# Altium PCB motor_crash_detection_device_pcb.PcbDoc
Units mil, origin at the board's own origin, x right, y up, seen from the top; angles counter-clockwise.
Board outline 6000 x 4000 mil, 2 copper layers (Top Layer, Bottom Layer); 39 components, 25 nets, 140 pads, 0 vias.
Unrouted connection lines stored in the file: 76.
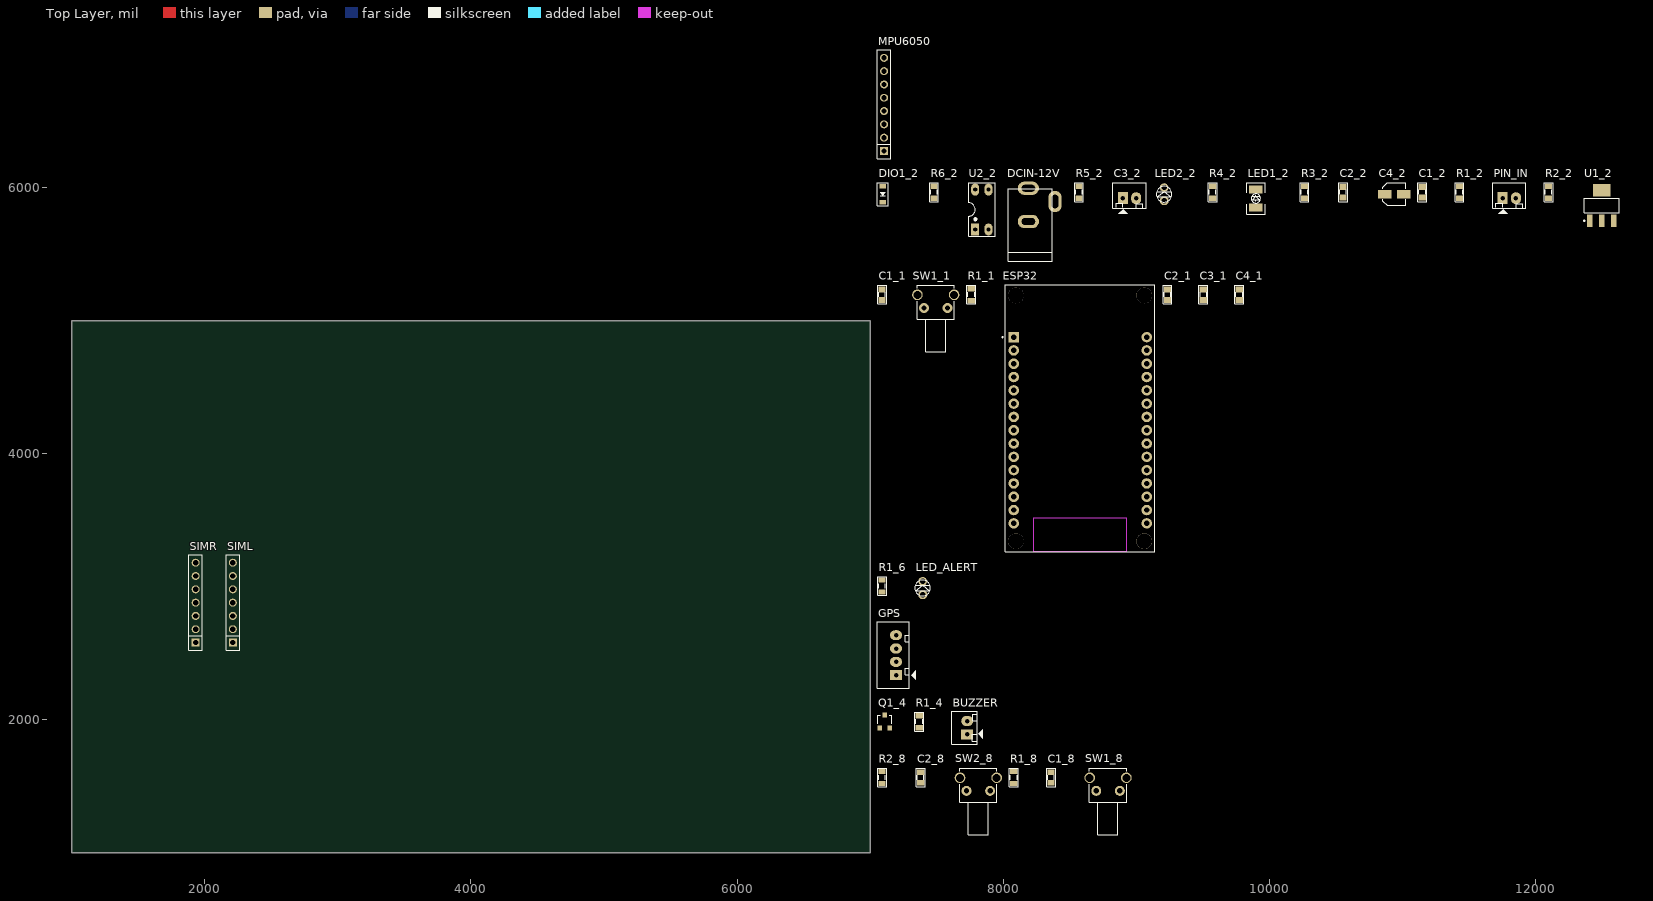
[diagram p0: Top Layer view]
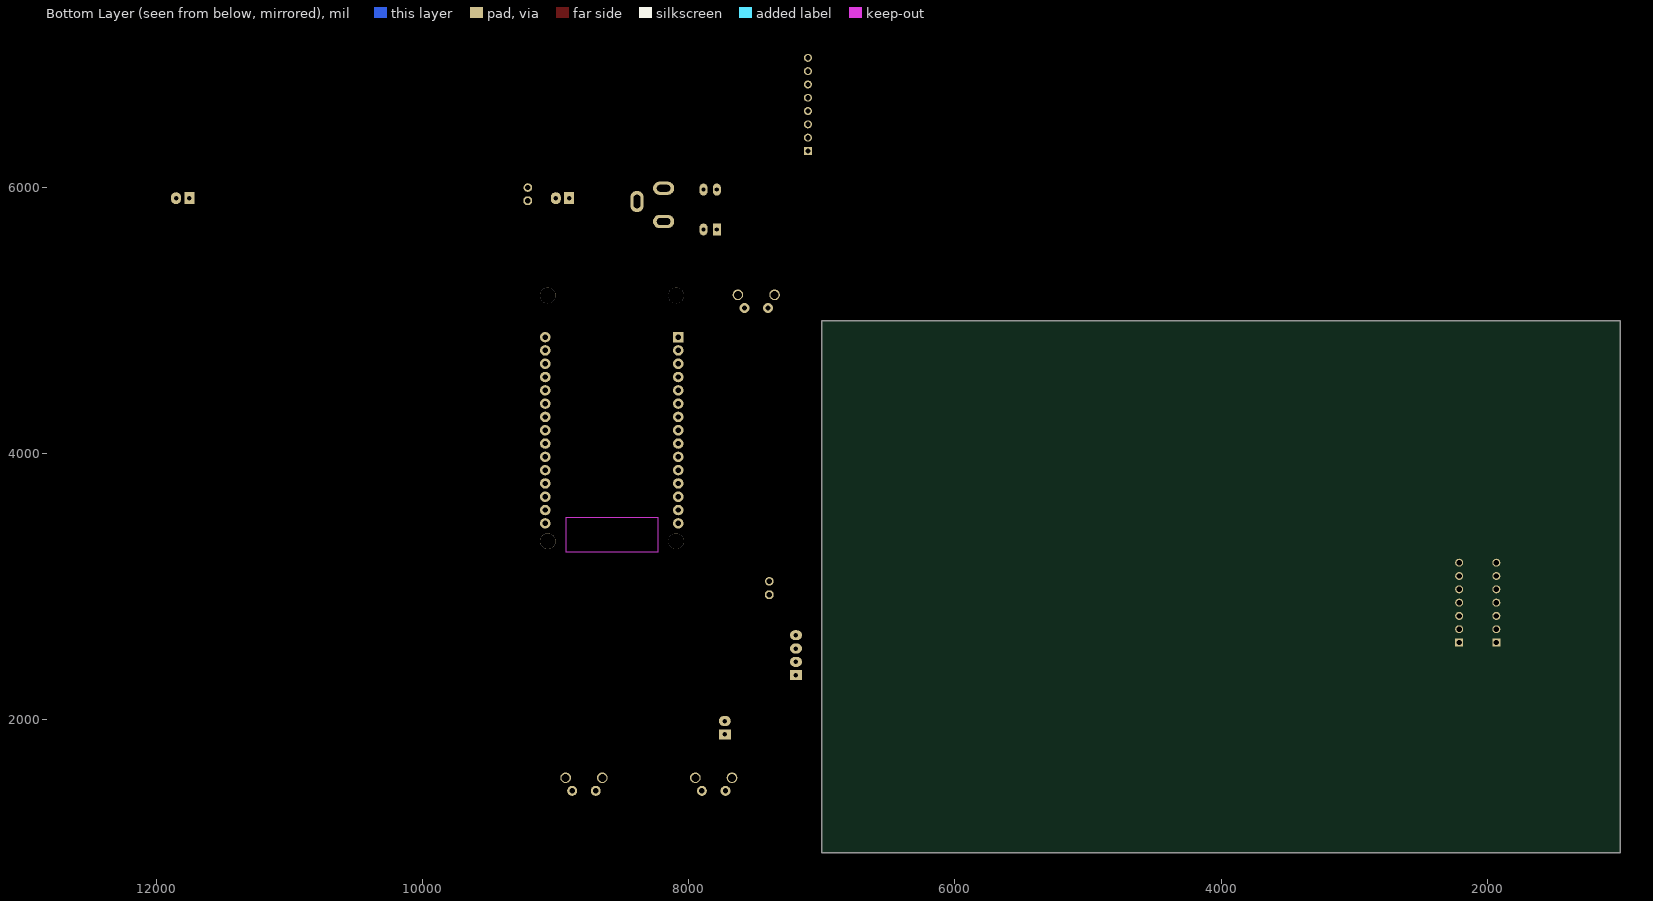
[diagram p1: Bottom Layer view, seen from below]

## Layer stack, top to bottom
Top Solder: solder mask 0.4, Solder Resist, Dk 3.5
Top Layer: signal copper 1.4
Dielectric 1: dielectric 12.6, FR-4, Dk 4.8
Bottom Layer: signal copper 1.4
Bottom Solder: solder mask 0.4, Solder Resist, Dk 3.5

## Board outline
1000,1000 7000,1000 7000,5000 1000,5000

## Design rules (kind name [scope] priority, off if disabled: settings)
Clearance [All] p1: gap=10 ignorepadtopadclearanceinfootprint=FALSE except(0: Arc-Hole Track-Hole SMDPad-Hole THPad-Hole Via-Hole Fill-Hole Poly-Hole Region-Hole Text-Hole)
PolygonConnect [All] p1: connectstyle=Relief reliefconductorwidth=10 reliefentries=4 polygonreliefangle="90 Angle" airgapwidth=10
RoomDefinition Designator_7 [InComponentClass('Designator')] p1: confinementstyle=ConfineIn formatcopy=TRUE lockcomponents=FALSE outline 1870,2510 2395,2510 2395,3350 1870,3350
RoomDefinition Designator_6 [InComponentClass('Designator')] p2: confinementstyle=ConfineIn formatcopy=TRUE lockcomponents=FALSE outline 7045,7195 7570,7195 7570,8035 7045,8035
RoomDefinition Designator_5 [InComponentClass('Designator')] p3: confinementstyle=ConfineIn formatcopy=TRUE lockcomponents=FALSE outline 7045,7195 7570,7195 7570,8035 7045,8035
RoomDefinition Designator_4 [InComponentClass('Designator')] p4: confinementstyle=ConfineIn formatcopy=TRUE lockcomponents=FALSE outline 7045,7195 7570,7195 7570,8035 7045,8035
RoomDefinition Designator_3 [InComponentClass('Designator')] p5: confinementstyle=ConfineIn formatcopy=TRUE lockcomponents=FALSE outline 7045,7195 7570,7195 7570,8035 7045,8035
RoomDefinition Designator_2 [InComponentClass('Designator')] p6: confinementstyle=ConfineIn formatcopy=TRUE lockcomponents=FALSE outline 7045,7195 7570,7195 7570,8035 7045,8035
RoomDefinition Designator_1 [InComponentClass('Designator')] p7: confinementstyle=ConfineIn formatcopy=TRUE lockcomponents=FALSE outline 7045,7195 7570,7195 7570,8035 7045,8035
RoomDefinition Designator [InComponentClass('Designator')] p8: confinementstyle=ConfineIn formatcopy=TRUE lockcomponents=FALSE outline 7045,7195 7570,7195 7570,8035 7045,8035
RoutingVias [All] p1: holewidth=28 width=50 viastyle="Through Hole" minholewidth=28 minwidth=50 maxholewidth=28 maxwidth=50
SolderMaskExpansion [All] p1: expansion=4 istentingtop=FALSE
Width [All] p1: maxlimit=10 minlimit=10 preferedwidth=10
30 further rules are at their usual default settings.

## Classes and differential pairs
component class Designator: SIML SIMR

## Components (designator, comment, footprint, x,y, rotation, side; value= is the part's Value field where it differs from the comment)
BUZZER "Buzzer" Header2 7730,1890 r90 top
C1_1 "100nF" CN-SMD-0805 7090,5195 r90 top value=33pF
C1_2 "100nF" CN-SMD-0805 11150,5965 r90 top value=33pF
C1_8 "100nF" CN-SMD-0805 8360,1565 r90 top value=33pF
C2_1 "100nF" CN-SMD-0805 9235,5195 r90 top value=33pF
C2_2 "100nF" CN-SMD-0805 10555,5965 r90 top value=33pF
C2_8 "100nF" CN-SMD-0805 7380,1565 r90 top value=33pF
C3_1 "100nF" CN-SMD-0805 9505,5195 r90 top value=33pF
C3_2 "12DC-PIN" Header2 8900,5920 r0 top
C4_1 "100nF" CN-SMD-0805 9775,5195 r90 top value=33pF
C4_2 "10uF-16V" CAP-ALU-SMD-4.5x5x1.4 10940,5950 r0 top
DCIN-12V "DCIN-12V" DC0 8290,5870 r90 top value="Jac DC"
DIO1_2 "Diode SMD" DIO-SMD-123 7095,5950 r90 top value=1N5007
ESP32 "ESP32" MODULE_ESP32_DEVKIT_V1 8580,4265 r0 top
GPS "GPS" Header4 7195,2335 r90 top
LED1_2 "LED" LED-GREEN-0805 9900,5850 r90 top value="LED 3 - 5 ly 2 Colour"
LED2_2 "LED" LED-3MM-RED 9210,5900 r90 top value="LED 3 ly Single Colour"
LED_ALERT "LED" LED-3MM-GREEN 7395,2940 r90 top value="LED 3 ly Single Colour"
MPU6050 "MPU6050" JP8-C1T 7105,6275 r90 top
PIN_IN "PIN_IN" Header2 11755,5920 r0 top
Q1_4 "C1815" SOT23-321 7110,1985 r0 top
R1_1 "10k" RES-SMD-0805 7760,5195 r90 top
R1_2 "10k" RES-SMD-0805 11430,5965 r90 top
R1_4 "1k" RES-SMD-0805 7370,1985 r90 top
R1_6 "1k" RES-SMD-0805 7090,3005 r90 top
R1_8 "10k" RES-SMD-0805 8080,1565 r90 top
R2_2 "220" RES-SMD-0805 12100,5965 r90 top
R2_8 "10k" RES-SMD-0805 7090,1565 r90 top
R3_2 "1k" RES-SMD-0805 10265,5965 r90 top
R4_2 "2k" RES-SMD-0805 9575,5965 r90 top
R5_2 "10k" RES-SMD-0805 8570,5965 r90 top
R6_2 "10k" RES-SMD-0805 7480,5965 r90 top
SIML "SIM" JP7-C1T 2210,2580 r90 top
SIMR "SIM" JP7-C1T 1930,2580 r90 top
SW1_1 "SW" SW1-DIP 7405,5095 r0 top value="SW chip 2 pin"
SW1_8 "SW" SW1-DIP 8700,1465 r0 top value="SW chip 2 pin"
SW2_8 "SW" SW1-DIP 7725,1465 r0 top value="SW chip 2 pin"
U1_2 "LM1117-3.3V" SOT223 12500,5865 r0 top
U2_2 "PC817" DIP4 7790,5685 r0 top

## Footprints (in the part's own frame and the unit in brackets; to place one, negate y for a bottom-side part, rotate by r counter-clockwise, add the part's x,y. Pads: shape width x height; smd on the part's side, far side on the other; paste and mask are expansions set on the pad)
CAP-ALU-SMD-4.5x5x1.4 [mm]
  rect 2.6x1.6 smd: 1(-1.8,0) 2(1.8,0)
  silkscreen extent -2.15,-2.15 2.15,2.15, body extent -2.5,-2.15 2.5,2.15, height 5.45
CN-SMD-0805 [mil]
  rect 43.31x55 smd: 1(-39.36,0.01) 2(39.37,0.01)
  silkscreen extent -70,-34 70,33, body extent -39,-25 39,25, height 31
DC0 [mil] "Jac DC input"
  oval 100x160 hole 50 slot 100 at 90 deg: 1(125,100) 2(-125,100)
  oval 160x100 hole 50 slot 100 at 0 deg: 3(25,-100)
  silkscreen extent -425,-80 120,250, body extent -410,-105 134,269, height 434
DIO-SMD-123 [mm]
  rect 0.9x1.2 smd: 1(1.524,0) 2(-1.524,0)
  silkscreen extent -2.16,-1.02 2.16,1.02, body extent -1.76,-0.8 1.94,0.8, height 1.25
DIP4 [mil]
  rect 60x90 hole 31: 1(0,0)
  oval 60x90 hole 31: 2(100,0) 3(100,300) 4(0,300)
  silkscreen extent -50,-50 150,350, body extent -59,-10 159,305, height 170
Header2 [mil] "CON2"
  rect 75x90 hole 34: 1(0,0)
  oval 75x90 hole 34: 2(100,0)
  silkscreen extent -75,-118 175,115, body extent -68,-70 168,107, height 236
Header4 [mil] "CON4"
  rect 75x90 hole 34: 1(0,0)
  oval 75x90 hole 34: 2(100,0) 3(200,0) 4(300,0)
  silkscreen extent -100,-150 400,140, body extent -90,-90 398,136, height 276
JP7-C1T [mm] "7 row, straight, gold plating"
  rect 1.52x1.52 hole 1.02: 1(0,0)
  round 1.52 hole 1.02: 2(2.54,0) 3(5.08,0) 4(7.62,0) 5(10.16,0) 6(12.7,0) 7(15.24,0)
  silkscreen extent -1.52,-1.27 16.76,1.27, body extent -1.52,-1.25 16.76,1.25, height 8.51
JP8-C1T [mm] "8 row, straight, gold plating"
  rect 1.52x1.52 hole 1.02: 1(0,0)
  round 1.52 hole 1.02: 2(2.54,0) 3(5.08,0) 4(7.62,0) 5(10.16,0) 6(12.7,0) 7(15.24,0) 8(17.78,0)
  silkscreen extent -1.52,-1.27 19.3,1.27, body extent -1.52,-1.25 19.3,1.25, height 8.51
LED-3MM-GREEN [mil]
  oct 65x65 hole 40: 1(0,0)
  round 65 hole 40: 2(100,0)
  silkscreen extent -9,-59 109,59, body extent -15,-70 112,60, height 182
LED-3MM-RED [mil]
  oct 65x65 hole 40: 1(0,0)
  round 65 hole 40: 2(100,0)
  silkscreen extent -9,-59 109,59, body extent -27,-77 117,80, height 181
LED-GREEN-0805 [mil]
  rect 60x100 smd: 1(0,0) 2(135,0)
  silkscreen extent -50,-70 185,70, body extent -20,-60 154,60, height 75
MODULE_ESP32_DEVKIT_V1 [mm]
  rect 2x2 hole 1.02: 1(-12.7,15.515)
  round 2 hole 1.02: 2(-12.7,12.975) 3(-12.7,10.435) 4(-12.7,7.895) 5(-12.7,5.355) 6(-12.7,2.815) 7(-12.7,0.275) 8(-12.7,-2.265) 9(-12.7,-4.805) 10(-12.7,-7.345) 11(-12.7,-9.885) 12(-12.7,-12.425) 13(-12.7,-14.965) 14(-12.7,-17.505) 15(-12.7,-20.045) 16(12.7,-20.045) 17(12.7,-17.505) 18(12.7,-14.965) 19(12.7,-12.425) 20(12.7,-9.885) 21(12.7,-7.345) 22(12.7,-4.805) 23(12.7,-2.265) 24(12.7,0.275) 25(12.7,2.815) 26(12.7,5.355) 27(12.7,7.895) 28(12.7,10.435) 29(12.7,12.975) 30(12.7,15.515)
  round 3 hole 3 unplated: ""(-12.28,-23.475) ""(-12.28,23.475) ""(12.23,-23.475) ""(12.23,23.475)
  Keep-Out Layer region: 8.78,-25.475 -8.91,-25.475 -8.91,-18.985 8.78,-18.985
  Keep-Out Layer region: 8.78,-25.475 -8.91,-25.475 -8.91,-18.985 8.78,-18.985
  silkscreen extent -14.95,-25.48 14.23,25.48
RES-SMD-0805 [mil]
  rect 39.37x55 smd: 1(-45,0) 2(45,0)
  silkscreen extent -70,-34 70,33, body extent -39,-25 39,25, height 31
SOT23-321 [mm]
  rect 0.9x0.95 smd mask+0: 1(0.95,-1.25)
  rect 0.9x0.95 smd: 2(0,1.25) 3(-0.95,-1.25)
  silkscreen extent -1.3,-0.38 1.3,1.25, body extent -1.52,-1.23 1.48,1.27, height 1.06
SOT223 [mm]
  rect 1x2.4 smd: 1(-2.3,-2.9) 2(0,-2.9) 3(2.3,-2.9)
  rect 3.3x2.4 smd: 4(0,2.9)
  silkscreen extent -3.47,-3.02 3.35,1.4, body extent -3.25,-3.56 3.25,3.4, height 1.68
SW1-DIP [mil]
  round 75 hole 40: 1(0,0) 2(177.16,0)
  round 80 hole 60: ""(-49.21,98.43) ""(226.38,98.43)
  silkscreen extent -51,-331 228,171, body extent -87,-398 265,160, height 283

## Part data
BUZZER C3_2 PIN_IN: library part Header2, "Header IDC, 2 x 1 Pin Vertical 2.54mm Pitch (Non-Boxed, Male)", Manufacturer="W¨¹rth Elektronik eiSos GmbH", partNo=613002143121, ComponentLink1 Description=Manufacturer, ComponentLink1URL=http://www.we-online.com, ComponentLink2 Description=Datasheet, ComponentLink2URL=http://katalog.we-online.de/em/datasheet/6130xx143121.pdf, Created by="Karrer Zheng", Created Date="29 March 2013", NoPins=02
C1_1 C1_2 C1_8 C2_1 C2_2 C2_8 C3_1 C4_1: library part CN
C4_2: library part CN-ALU-SMD, "Polarized Capacitor (Axial)", LatestRevisionDate=17-Jul-2002, LatestRevisionNote="Re-released for DXP Platform.", PackageReference=POLAR0.8, Published=8-Jun-2000, Publisher="Altium Limited"
DCIN-12V: library part DCIN, "Jac DC input"
DIO1_2: "Default Diode", Code - JEDEC=DO-214-AB, Published=8-Jun-2000, Publisher="Altium Limited", Revision="July-2002: Re-released for DXP Platform."
ESP32: library part ESP32-DEVKIT-V1, "Dual core, Wi-Fi: 2.4 GHz up to 150 Mbits/s,BLE (Bluetooth Low Energy) and legacy Bluetooth, 32 bits, Up to 240 MHz", Package=None, Availability=Unavailable, MP=ESP32-DEVKIT-V1, Price=None
GPS: library part Header4, "Header IDC, 4 x 1 Pin Vertical 2.54mm Pitch (Non-Boxed, Male)", Manufacturer="W¨¹rth Elektronik eiSos GmbH", partNo=613002143121, ComponentLink1 Description=Manufacturer, ComponentLink1URL=http://www.we-online.com, ComponentLink2 Description=Datasheet, ComponentLink2URL=http://katalog.we-online.de/em/datasheet/6130xx143121.pdf, Created by="Karrer Zheng", Created Date="29 March 2013", NoPins=02
LED1_2: library part "LED SMD"
LED2_2 LED_ALERT: "LED Single colour Green and Red"
MPU6050: library part JP8, "WR-PHD 2.54 mm Angled Socket Header", Manufacturer="W¨¹rth Elektronik eiSos GmbH", partNo=613008143121, ComponentLink1 Description=Manufacturer, ComponentLink1URL=http://www.we-online.com, ComponentLink2 Description=Datasheet, ComponentLink2URL=http://katalog.we-online.de/em/datasheet/6130xx143121.pdf, Created by="Karrer Zheng", Created Date="29 March 2013", NoPins=08
Q1_4: library part 2SC1815, "NPN 600mW, ECB"
R1_1 R1_2 R1_4 R1_6 R1_8 R2_2 R2_8 R3_2 R4_2 R5_2 R6_2: library part Res-SMD, "Resistor", Manufacturer="Generic Components", Class=Passive, Published=08/06/2000, Publisher="Altium Hobart Technology Centre"
SIML SIMR: library part JP7, "WR-PHD 2.54 mm Angled Socket Header", Manufacturer="W¨¹rth Elektronik eiSos GmbH", partNo=613007143121, ComponentLink1 Description=Manufacturer, ComponentLink1URL=http://www.we-online.com, ComponentLink2 Description=Datasheet, ComponentLink2URL=http://katalog.we-online.de/em/datasheet/6130xx143121.pdf, Created by="Karrer Zheng", Created Date="29 March 2013", NoPins=07
SW1_1 SW1_8 SW2_8: library part SW2, "Switch button 2 pin"
U1_2: library part LM1117, "800mA Low-Dropout Linear Regulator", Creator="Nguyen Ba Bien", Website=http://group3i.net
U2_2: "Single Opto"

## Nets (pads, with @x,y where several pads share a name; then routed paths per layer and width w, separated by ;. In a path a pad name is that pad's centre, name@x,y a point inside that pad or via, vN(x,y) a via of type N, cw(c..) or ccw(c..) an arc to the next point about the centre after c; other vN are vias at no path point)
+3.3VDC: C1_8.1 C2_2.2 C2_8.1 GPS.4 MPU6050.1 R1_1.1 R2_2.2 R5_2.2 SW1_8.1 SW2_8.1 U1_2.2
+5VDC: BUZZER.1 C1_2.2 C2_1.2 C3_1.2 C4_1.2 C4_2.1 ESP32.30 PIN_IN.1 R1_2.1 R1_6.2 R3_2.2 SIMR.7 U1_2.3
DCIN_12V: C3_2.1 DCIN-12V.1 DIO1_2.1
DCIN_GND: C3_2.2 DCIN-12V.2 DCIN-12V.3 U2_2.2
ESP_RST: C1_1.2 ESP32.16 R1_1.2 SW1_1.2
GND: C1_1.1 C1_2.1 C2_1.1 C2_2.1 C3_1.1 C4_1.1 C4_2.2 ESP32.2 ESP32.29 GPS.3 LED1_2.2 LED2_2.2 MPU6050.2 PIN_IN.2 Q1_4.1 R1_8.2 R2_8.2 R4_2.2 SIMR.6 SW1_1.1 U1_2.1 U2_2.3
GPS_RX: ESP32.3 GPS.2
GPS_TX: ESP32.4 GPS.1
M_SCL: ESP32.14 MPU6050.3
M_SDA: ESP32.11 MPU6050.4
NetBUZZER_2: BUZZER.2 Q1_4.2
NetC1_8_2: C1_8.2 ESP32.24 R1_8.1 SW1_8.2
NetC2_8_2: C2_8.2 ESP32.25 R2_8.1 SW2_8.2
NetDIO1_2_2: DIO1_2.2 R6_2.2
NetESP32_19: ESP32.19 R5_2.1 U2_2.4
NetESP32_20: ESP32.20 R1_2.2 R4_2.1
NetESP32_21: ESP32.21 R1_4.2
NetESP32_26: ESP32.26 LED_ALERT.2
NetLED1_2_1: LED1_2.1 R2_2.1
NetLED2_2_1: LED2_2.1 R3_2.1
NetLED_ALERT_1: LED_ALERT.1 R1_6.1
NetQ1_4_3: Q1_4.3 R1_4.1
NetR6_2_1: R6_2.1 U2_2.1
SIM_RX: ESP32.6 SIMR.2
SIM_TX: ESP32.7 SIMR.1
pads on no net: ESP32. ESP32.1 ESP32.5 ESP32.8 ESP32.9 ESP32.10 ESP32.12 ESP32.13 ESP32.15 ESP32.17 ESP32.18 ESP32.22 ESP32.23 ESP32.27 ESP32.28 MPU6050.5 MPU6050.6 MPU6050.7 MPU6050.8 SIML.1 SIML.2 SIML.3 SIML.4 SIML.5 SIML.6 SIML.7 SIMR.3 SIMR.4 SIMR.5 SW1_1. SW1_8. SW2_8. U1_2.4